# Altium PCB PCB1.pcbdoc
Units mil, origin at the board's own origin, x right, y up, seen from the top; angles counter-clockwise.
Board outline 2240 x 2140 mil, 2 copper layers (Top Layer, Bottom Layer); 19 components, 12 nets, 59 pads, 0 vias.
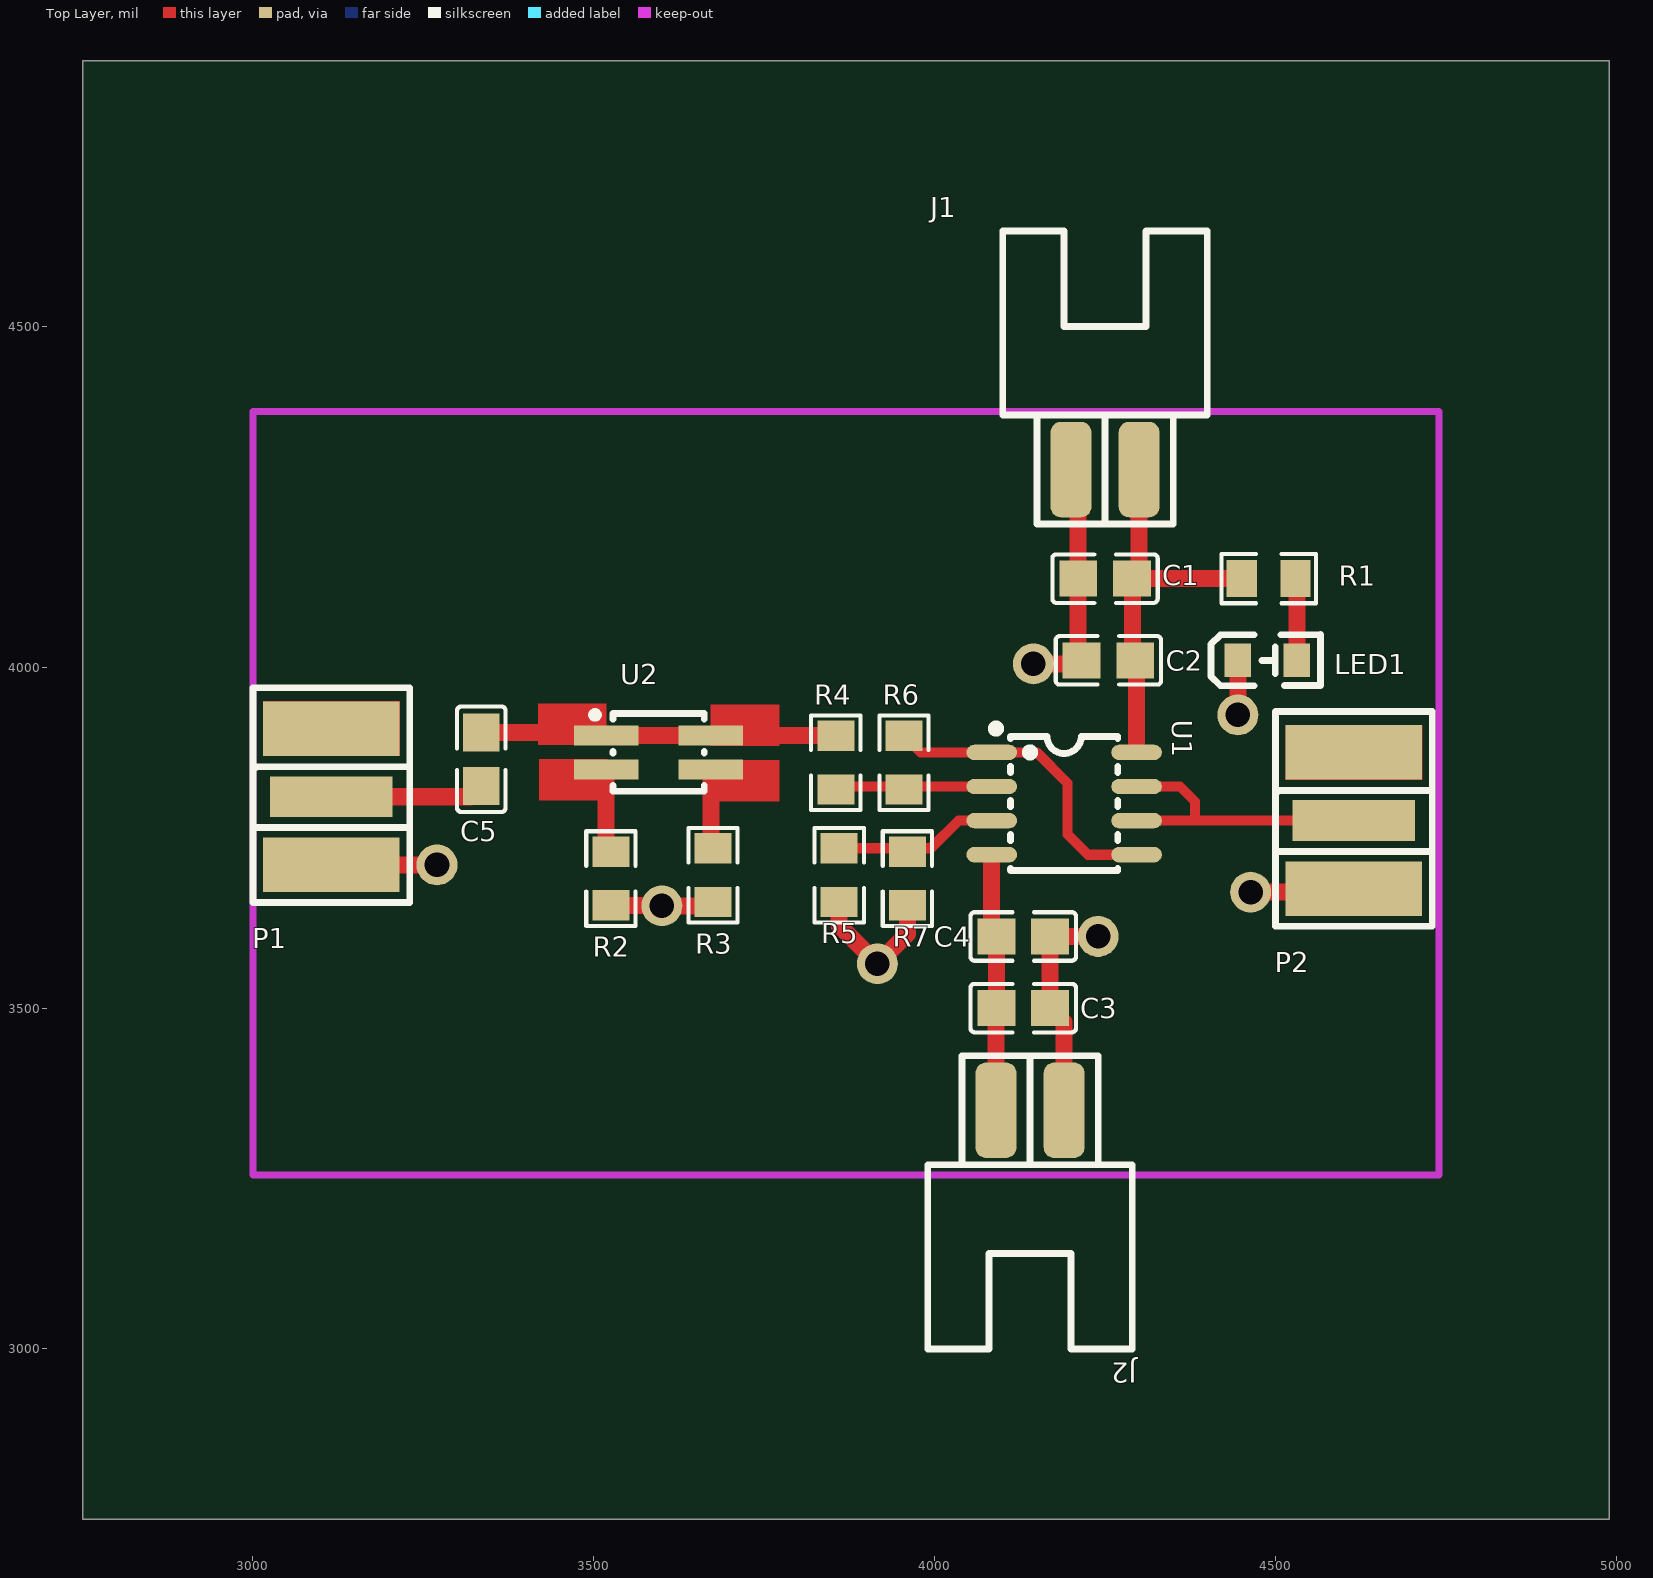
[diagram p0: Top Layer view]
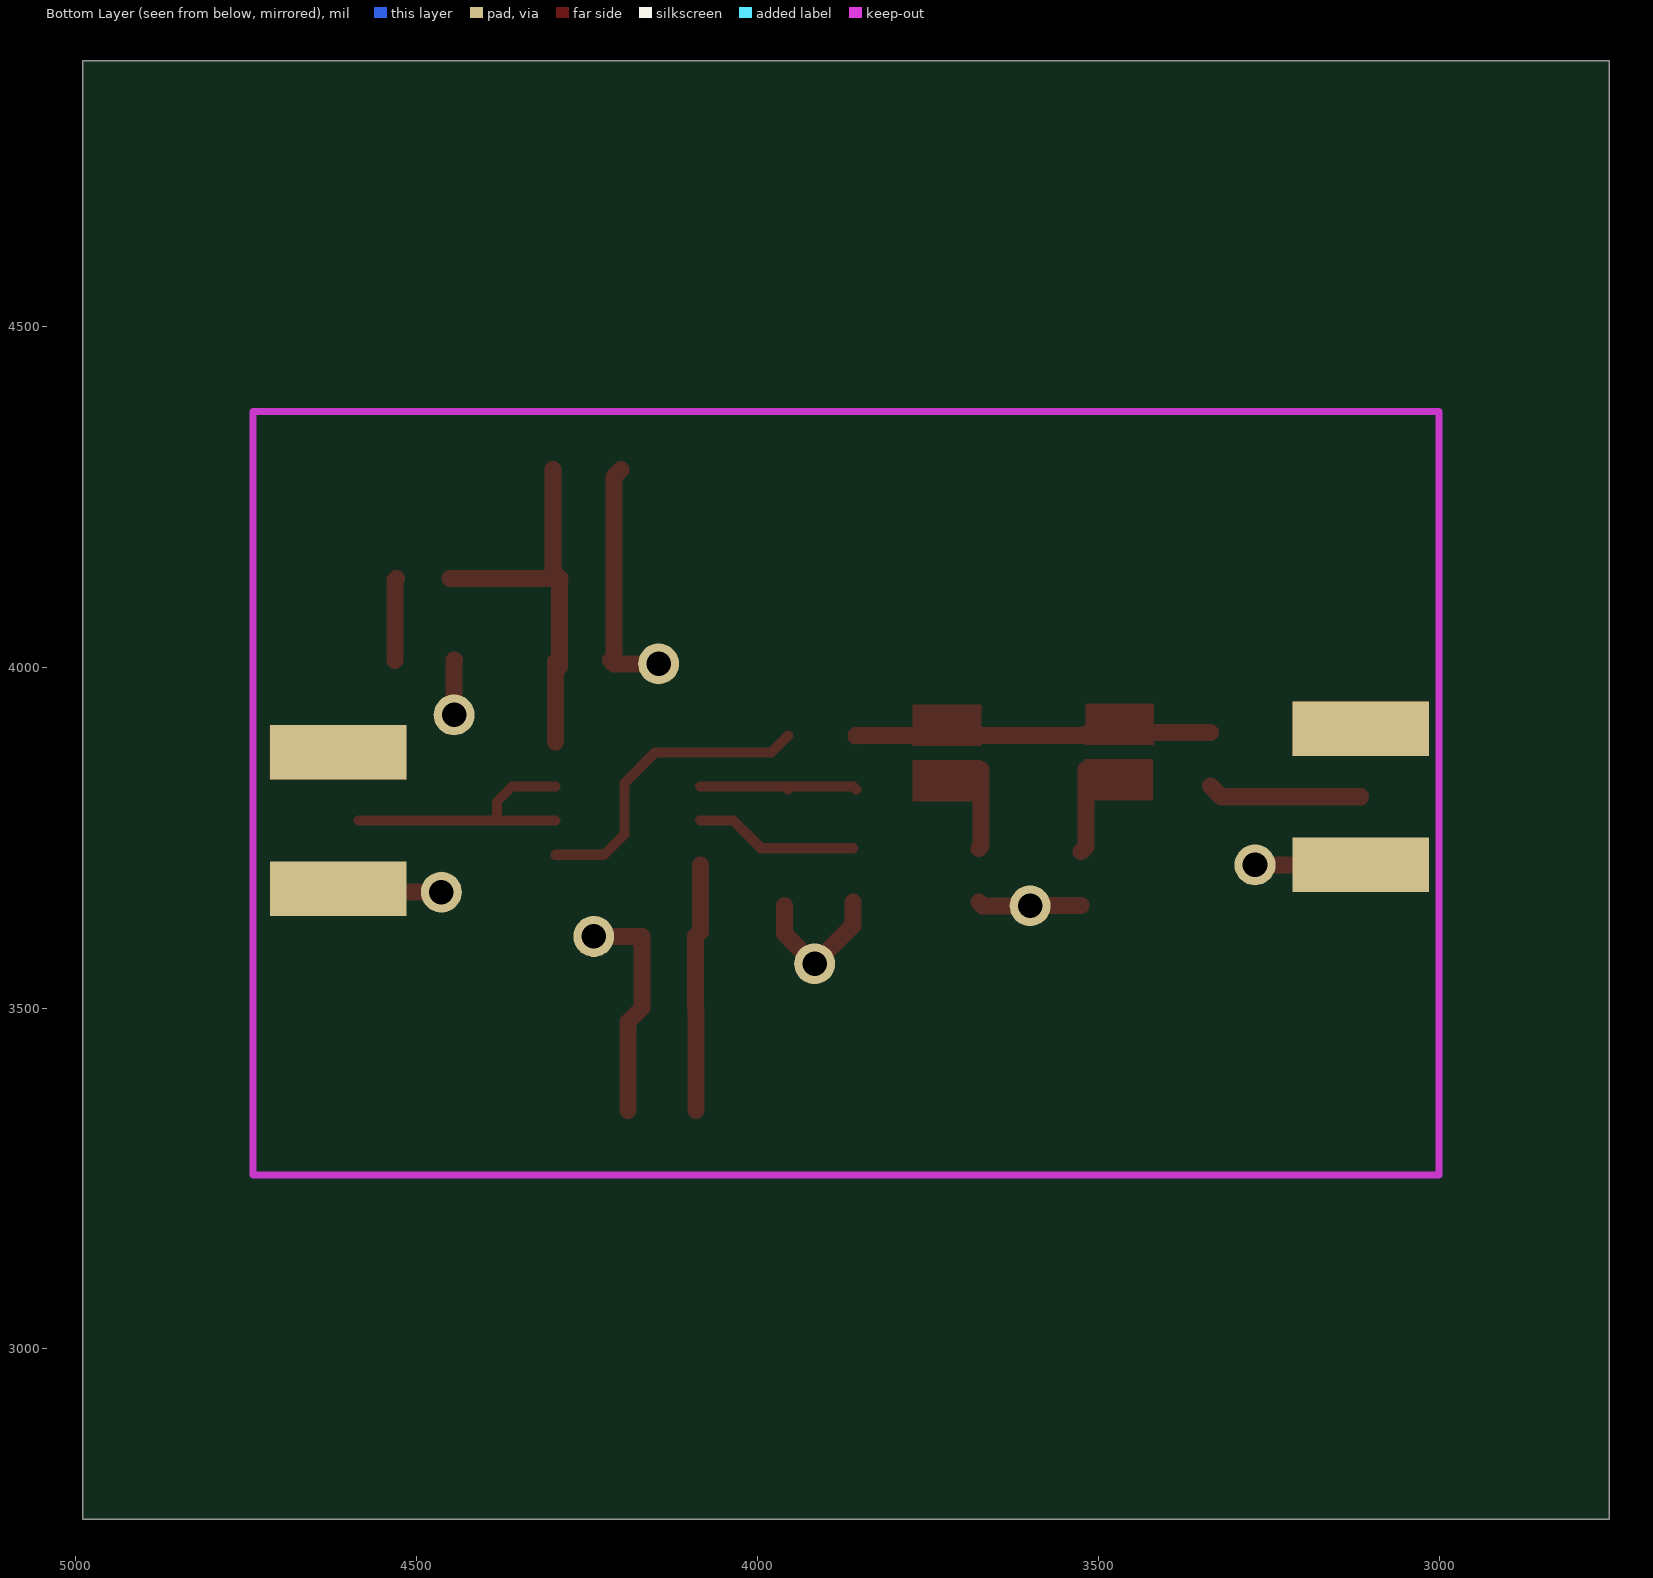
[diagram p1: Bottom Layer view, seen from below]

## Layer stack, top to bottom
Top Solder Mask Layer: solder mask 0.4, Solder Resist, Dk 3.5
Top Layer: signal copper 1.4
Dielectric1: dielectric 12.6, FR-4, Dk 4.8
Bottom Layer: signal copper 1.4
Bottom Solder Mask Layer: solder mask 0.4, Solder Resist, Dk 3.5

## Board outline
4990,2750 2750,2750 2750,4890 4990,4890

## Design rules (kind name [scope] priority, off if disabled: settings)
Clearance [All] p1: gap=10 ignorepadtopadclearanceinfootprint=FALSE except(0: Arc-Hole Track-Hole SMDPad-Hole THPad-Hole Via-Hole Fill-Hole Poly-Hole Region-Hole Text-Hole)
PolygonConnect [All] p1: connectstyle=Relief reliefconductorwidth=10 reliefentries=4 polygonreliefangle="90 Angle" airgapwidth=10
RoutingVias [All] p1: holewidth=28 width=50 viastyle="Through Hole" minholewidth=28 minwidth=50 maxholewidth=28 maxwidth=50
SolderMaskExpansion [All] p1: expansion=4 istentingtop=FALSE
Width [All] p1: maxlimit=10 minlimit=10 preferedwidth=10
30 further rules are at their usual default settings.

## Components (designator, comment, footprint, x,y, rotation, side; value= is the part's Value field where it differs from the comment)
C1 "CAP_0805" C0805 4250,4130 r180 top
C2 "CAP_0805" C0805 4255,4010 r180 top
C3 "CAP_0805" C0805 4130,3500 r180 top
C4 "CAP_0805" C0805 4130,3605 r180 top
C5 "CAP_0805" C0805 3335,3865 r90 top
J1 "CON2" sip2e 4300,4290 r0 top
J2 "CON2" sip2e 4090,3350 r180 top
LED1 "LED_0805-R" LED_0805 4490,4010 r0 top
P1 "BNC" SMA-E 3115,3810 r0 top
P2 "BNC" SMA-E 4615,3775 r0 top
R1 "Res_0805" R0805 4490,4130 r0 top
R2 "Res_0805" R0805 3525,3690 r90 top
R3 "Res_0805" R0805 3675,3695 r90 top
R4 "Res_0805" R0805 3855,3860 r270 top
R5 "Res_0805" R0805 3860,3695 r90 top
R6 "Res_0805" R0805 3955,3860 r90 top
R7 "Res_0805" R0805 3960,3690 r270 top
U1 "LT1361CS8#PBF" SO-8_L4.9-W3.9-P1.27-LS5.9-BL 4190,3800 r270 top
U2 "PZ127-2-02-S" HDR-SMD_4P-P1.27-V-M-R2-C2-LS5.3 3595,3875 r270 top

## Footprints (in the part's own frame and the unit in brackets; to place one, negate y for a bottom-side part, rotate by r counter-clockwise, add the part's x,y. Pads: shape width x height; smd on the part's side, far side on the other; paste and mask are expansions set on the pad)
C0805 [mm]
  rect 1.41x1.35 smd paste-100 mask+0.051: 1(-1,0) 2(1,0)
  silkscreen extent -1.96,-0.9 1.96,0.9
HDR-SMD_4P-P1.27-V-M-R2-C2-LS5.3 [mm]
  rect 0.74x2.4 smd paste+0 mask+0.05: 1(-0.635,-1.95) 2(-0.635,1.95) 3(0.635,-1.95) 4(0.635,1.95)
  silkscreen extent -1.52,-2.49 1.45,1.7
LED_0805 [mm]
  rect 1x1.25 smd paste+0 mask+0.051: 1(-1.15,0.005) 2(1.05,0.005)
  silkscreen extent -2.15,-0.94 1.93,0.97
R0805 [mm]
  rect 1.133x1.377 smd paste-100 mask+0.051: 1(-1,0) 2(1,0)
  silkscreen extent -1.76,-0.92 1.76,0.92
sip2e [mil]
  rrect50% 60x140 smd: 1(0,0) 2(-100,0)
  silkscreen extent -200,-80 100,350
SMA-E [mil]
  rect 180x60 smd: 1(0,0)
  rect 200x80 smd: 2(0,100) 4(0,-100)
  rect 200x80 smd far side: 3(0,100) 5(0,-100)
  Top Layer region: -100,60 100,60 100,140 -100,140
  silkscreen extent -115,-155 115,160
SO-8_L4.9-W3.9-P1.27-LS5.9-BL [mil]
  oval 22.6x74.33 smd: 1(-75,-106.26) 2(-25,-106.26) 3(25,-106.26) 4(75,-106.26) 5(75,106.26) 6(25,106.26) 7(-25,106.26) 8(-75,106.26)
  silkscreen extent -116,-106 98,79

## Free pads (board coordinates)
  round 60 hole 36: 3(3600,3650) 9(3916.1,3565) 10(3270,3710) 11(4145,4005) 11(4240,3605) 11(4445,3930) 11(4463.59,3670)

## Nets (pads, with @x,y where several pads share a name; then routed paths per layer and width w, separated by ;. In a path a pad name is that pad's centre, name@x,y a point inside that pad or via, vN(x,y) a via of type N, cw(c..) or ccw(c..) an arc to the next point about the centre after c; other vN are vias at no path point)
$1N705: LED1.2 R1.2 | length 120.6
  Top Layer w25: R1.2 4531.34,4128.03 LED1.2
$1N1104: C5.1 P1.1 | length 226.5
  Top Layer w25: P1.1 3319.37,3810 C5.1
$1N1369: C5.2 R4.1 U2.1 U2.2 | length 522.1
  Top Layer w25: C5.2 3513.86,3904.37 U2.1 U2.2 3854.37,3900 R4.1
$1N1384: R2.2 U2.3 | length 123.4
  Top Layer w25: U2.3 3518.23,3736.14 R2.2
$1N1387: R3.2 U2.4 | length 117
  Top Layer w25: U2.4 3671.77,3737.6 R3.2
$1N1400: R4.2 R6.1 U1.2 | length 236.7
  Top Layer w15: R4.2 3859.37,3825 R6.1@3959.37,3825 ; R6.1 R6.1@3959.37,3825 ; U1.2 R6.1@3959.37,3825
$1N1411: R5.2 R7.1 U1.3 | length 240.6
  Top Layer w15: R5.2 3960,3734.37 3994.37,3734.37 4035,3775 U1.3
$1N1472: R6.2 U1.1 U1.5 | length 457.4
  Top Layer w15: R6.2 3979.37,3875 U1.1 4150,3875 4195,3830 4195,3755 4225,3725 U1.5
$1N1543: P2.1 U1.6 U1.7 | length 411.6
  Top Layer w15: U1.6 4382.06,3775 ; U1.7 4360,3825 4382.06,3802.94 4382.06,3775 ; P2.1@4585,3775 4382.06,3775
+5V: C1.1 C2.1 J1.1 R1.1 U1.8 | length 576.7
  Top Layer w25: C2.1@4290,4000 4290,4129.37 C1.1 ; C2.1 4296.26,4008.11 4296.26,3890 ; J1.1 4300,4140.63 C1.1 ; R1.1 C1.1
-5V: C3.2 C4.2 J2.1 U1.4 | length 363.1
  Top Layer w25: 4083.74,3710 4083.74,3611.89 C4.2 C3.2 4090,3499.37 J2.1
GND: C1.2 C2.2 C3.1 C4.1 J1.2 J2.2 LED1.1 P1.2 P1.3 P1.4 P1.5 P2.2 P2.3 P2.4 P2.5 pad.3 pad.9 pad.10 pad.11 R2.1 R3.1 R5.1 R7.2 | length 1452.4
  Top Layer w25: P1.4 pad.10 ; R2.1 3599.37,3650.63 pad.3 3669.37,3650 R3.1 ; R5.1 3860,3621.1 pad.9 3960,3608.9 R7.2 ; pad.11@4145,4005 4210.63,4005 C2.2 4210.63,4015 C1.2 4210.63,4279.37 J1.2 ; J2.2 4190,3479.37 C3.1 C4.1 pad.11@4240,3605 ; LED1.1 4445,4009.92 pad.11@4445,3930 ; pad.11@4463.59,3670 4610,3670 P2.4

## Keep-outs
Board Outline Layer:
  lines w10: 3000,3255 4740,3255 4740,4375 3000,4375 3000,3255

## Other copper
Top Layer:
  region net $1N1369: 3671.77,3885 3771.77,3885 3771.77,3945 3671.77,3945
  region net $1N1369: 3418.23,3886.18 3518.23,3886.18 3518.23,3946.18 3418.23,3946.18
  region net $1N1387: 3671.77,3803.16 3771.77,3803.16 3771.77,3863.16 3671.77,3863.16
  region net $1N1384: 3420,3805 3520,3805 3520,3865 3420,3865